# Altium PCB FormationPCB.PcbDoc
Units mm, origin at the board's own origin, x right, y up, seen from the top; angles counter-clockwise.
Board outline 40 x 40 mm, 2 copper layers (Top Layer, Bottom Layer); 11 components, 8 nets, 29 pads, 0 vias.
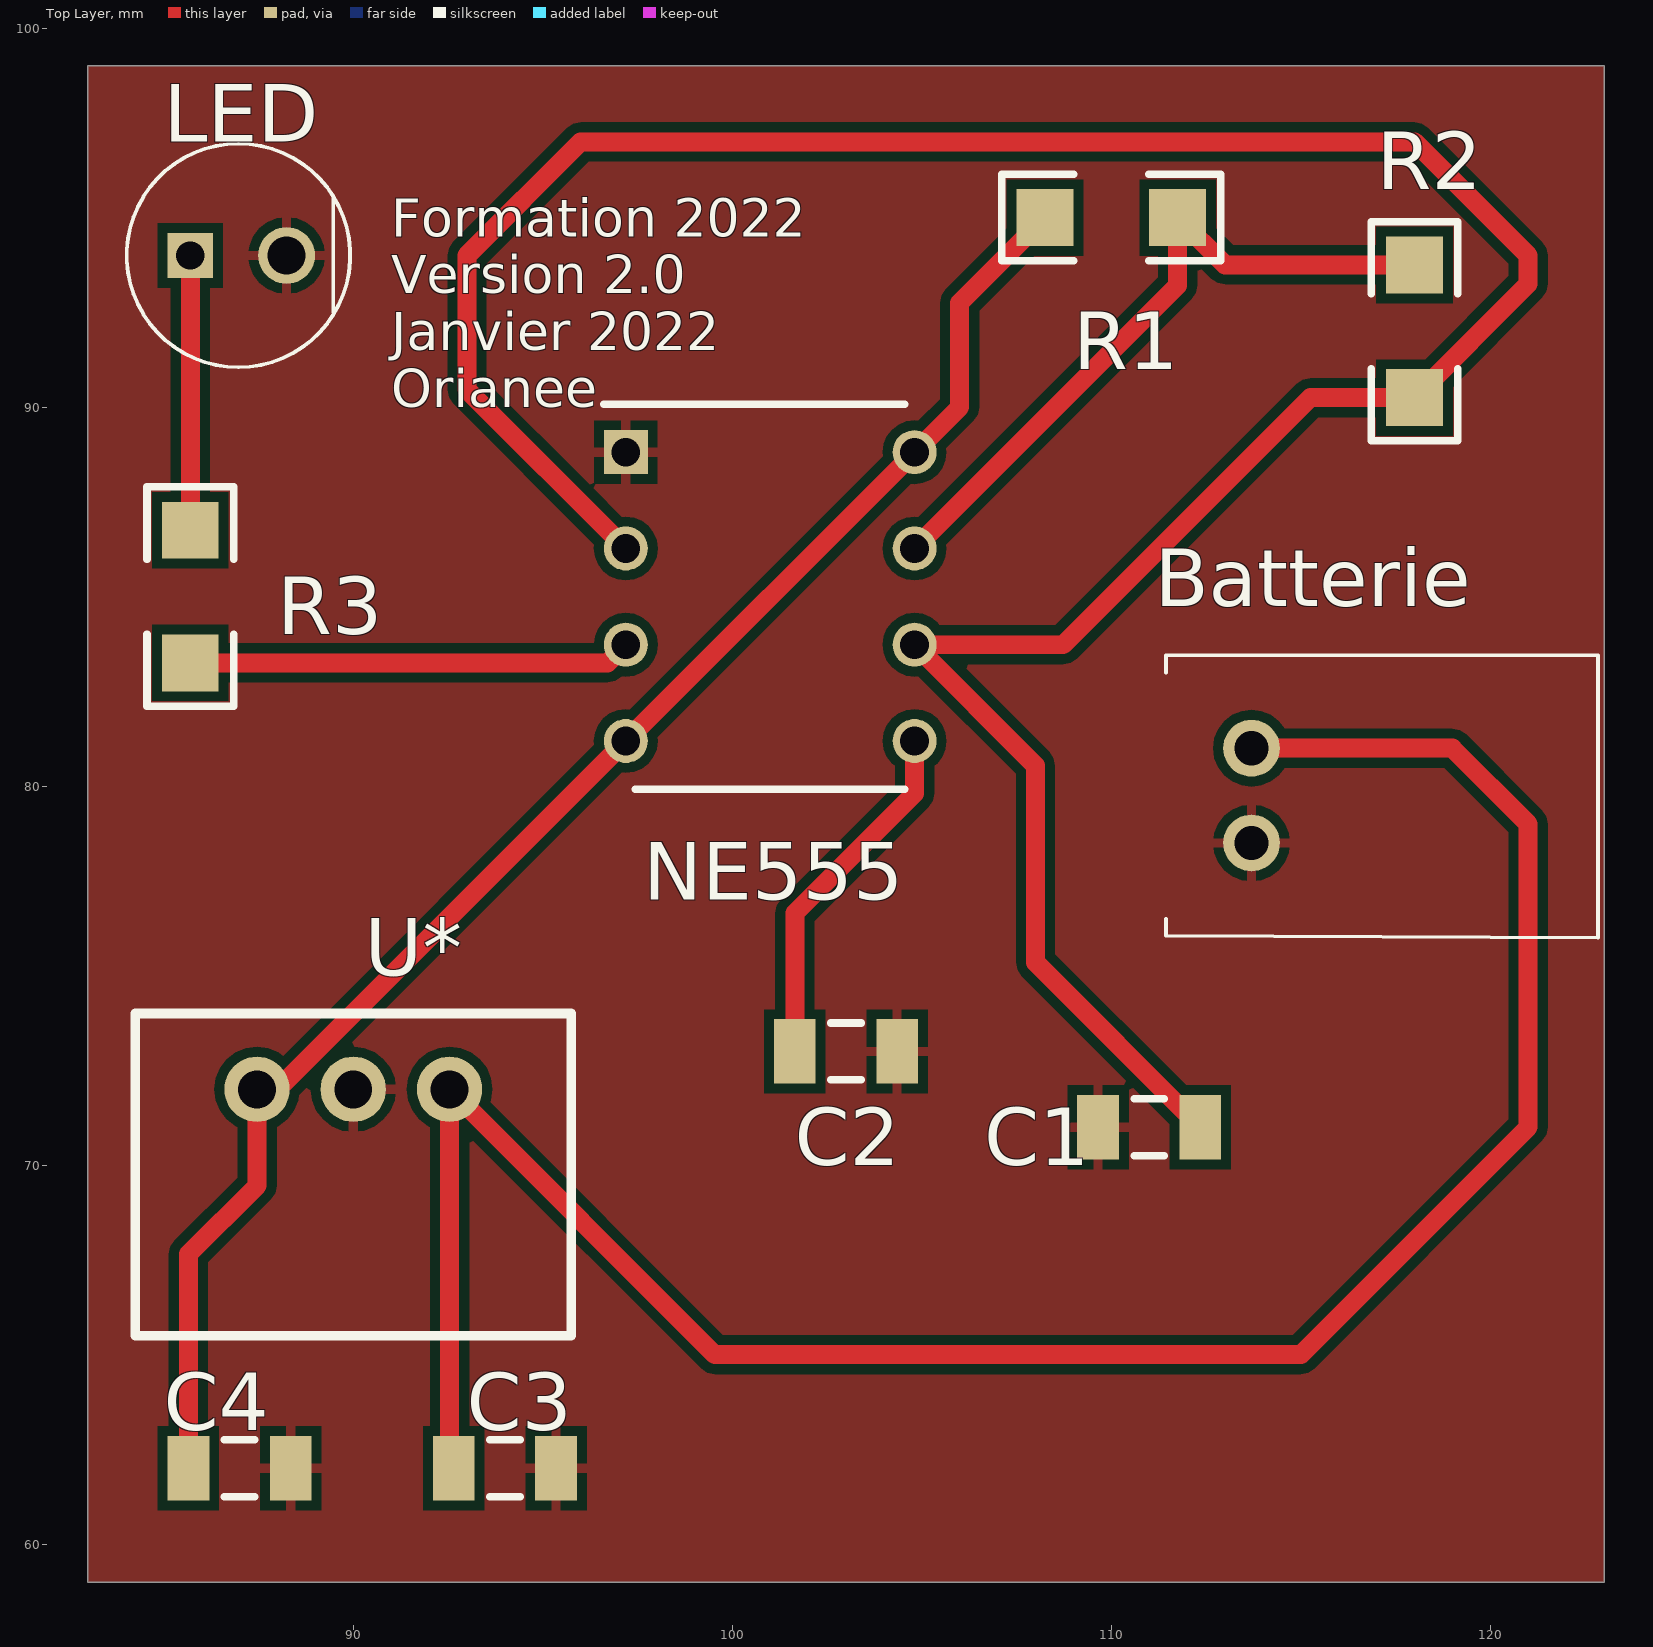
[diagram p0: Top Layer view]
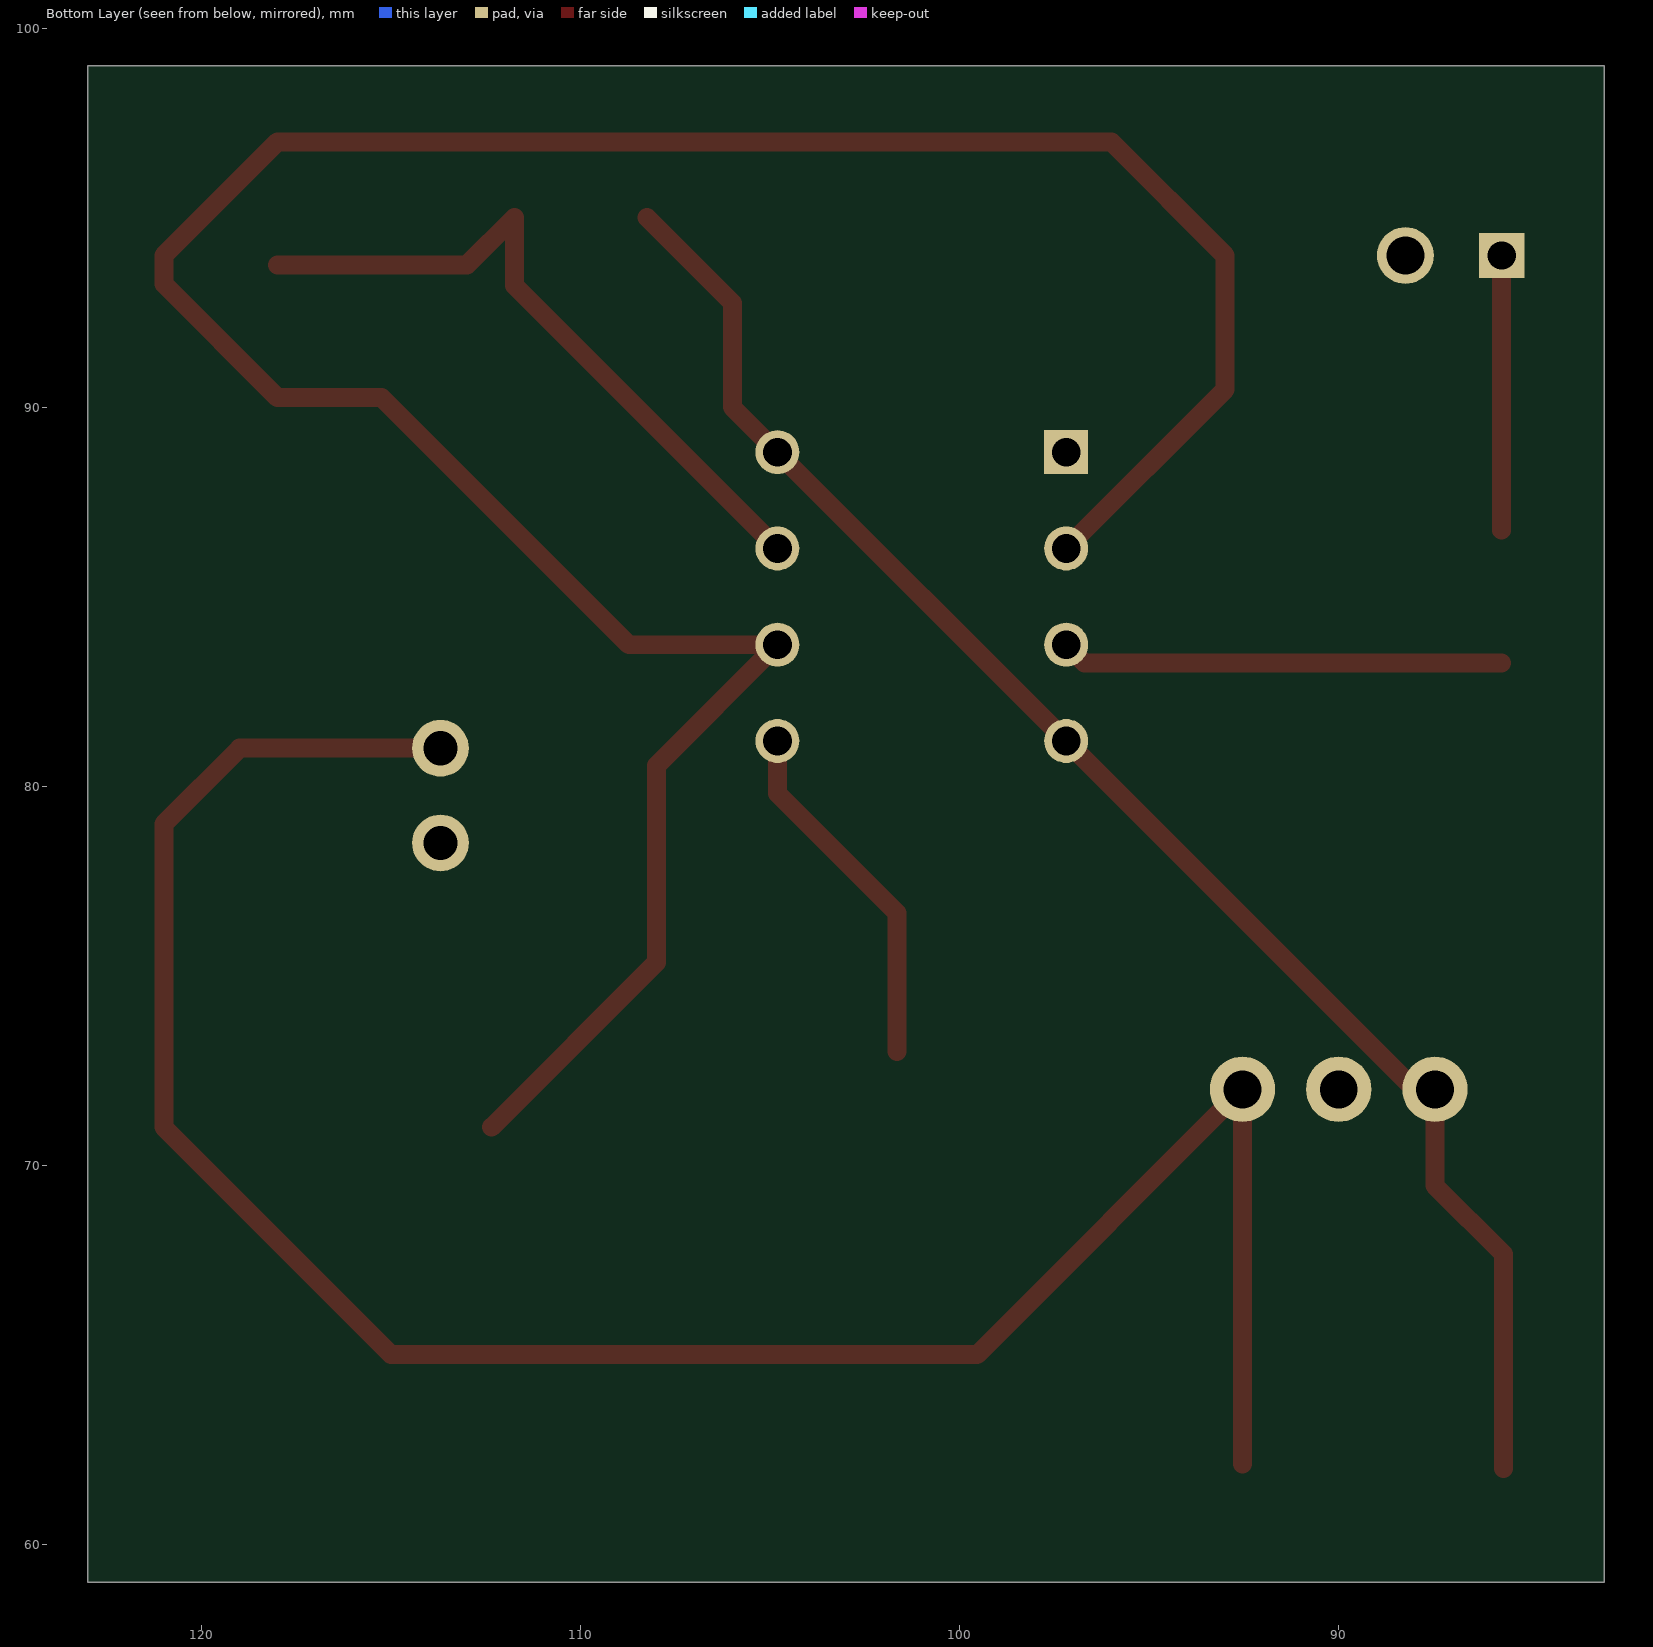
[diagram p1: Bottom Layer view, seen from below]
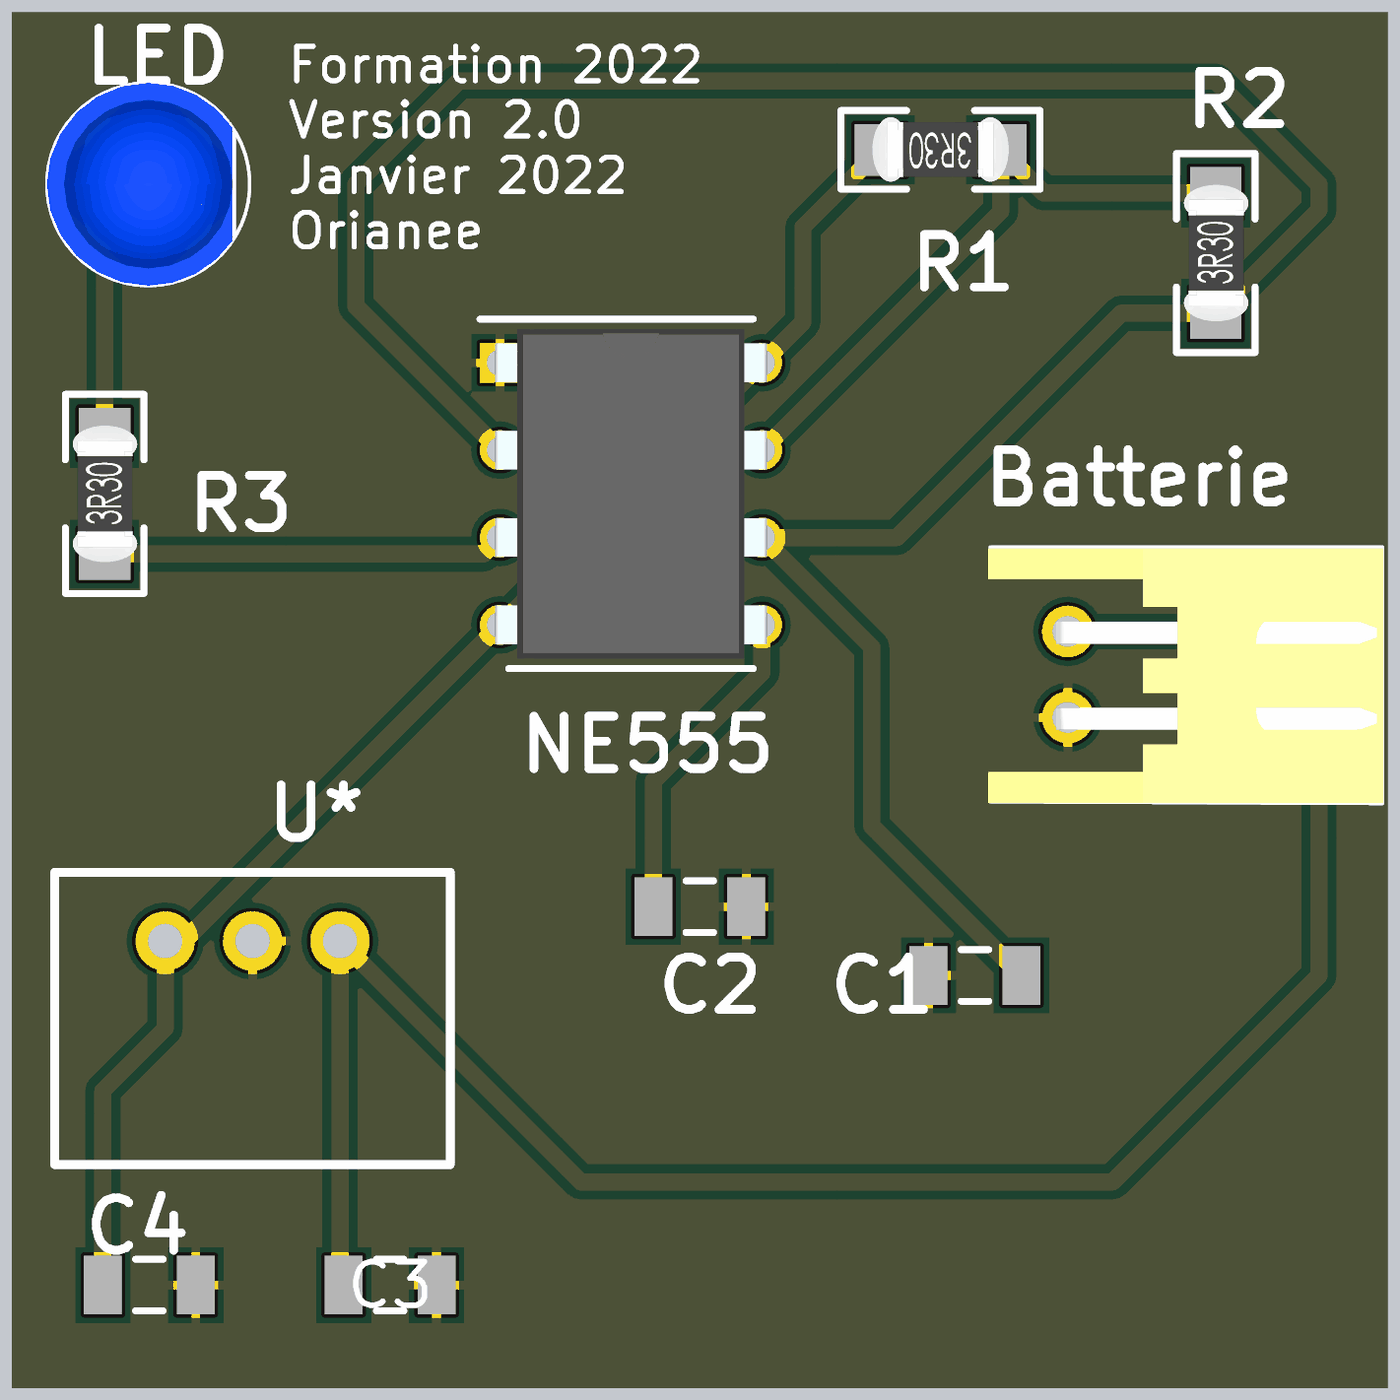
[diagram p2: 3D render of the assembled board from above, using the file's embedded part models]

## Layer stack, top to bottom
Top Solder: solder mask 0.0102, Solder Resist, Dk 3.5
Top Layer: signal copper 0.0356
Dielectric 1: dielectric 0.32, FR-4, Dk 4.8
Bottom Layer: signal copper 0.0356
Bottom Solder: solder mask 0.0102, Solder Resist, Dk 3.5

## Board outline
83,59 83,99 123,99 123,59

## Design rules (kind name [scope] priority, off if disabled: settings)
Clearance Clearance_1 [All] p1: gap=0.254
Clearance [All] p2: gap=0.254
PolygonConnect [All] p1: connectstyle=Relief reliefconductorwidth=0.254 reliefentries=4 polygonreliefangle="90 Angle" airgapwidth=0.254
RoutingVias [All] p1: holewidth=0.711 width=1.27 viastyle="Through Hole" minholewidth=0.711 minwidth=1.27 maxholewidth=0.711 maxwidth=1.27
SolderMaskExpansion [All] p1: expansion=0.102
Width [All] p1: maxlimit=5 minlimit=0.254 preferedwidth=0.5
30 further rules are at their usual default settings.

## Classes and differential pairs
component class Schema1: Batterie C1 C2 C3 C4 LED R1 R2 R3 U*

## Components (designator, comment, footprint, x,y, rotation, side; value= is the part's Value field where it differs from the comment)
Batterie "S2B-XH-A-1_LF__SN_" S2B-XH-A 113.7,81 r270 top
C1 "" C1206 111,71 r0 top
C2 "" C1206 103,73 r180 top
C3 "" C1206 94,62 r0 top
C4 "" C1206 87,62 r180 top
LED "151051BS04000" 151051BS04000 85.7,94 r0 top
NE555 "NE555N" DIP762W56P254L959H533Q8N 101,85 r0 top
R1 "" "Resistor 1206" 110,95 r180 top
R2 "" "Resistor 1206" 118,92 r90 top
R3 "" "Resistor 1206" 85.7,85 r90 top
U* "L78S12CV" R-78B 90,72 r0 top

## Footprints (in the part's own frame and the unit in brackets; to place one, negate y for a bottom-side part, rotate by r counter-clockwise, add the part's x,y. Pads: shape width x height; smd on the part's side, far side on the other; paste and mask are expansions set on the pad)
151051BS04000 [mm]
  rect 1.2x1.2 hole 0.75: 1(0,0)
  round 1.5 hole 1: 2(2.54,0)
  silkscreen extent -1.68,-2.95 4.22,2.95, body extent -1.68,-2.95 3.72,2.95, height 13.22
C1206 [mm] "Chip Capacitor, Body 3.2x1.6mm, IPC High Density"
  rect 1.1x1.7 smd: 1(-1.35,0) 2(1.35,0)
  silkscreen extent -0.4,-0.75 0.4,0.75, body extent -1.7,-0.9 1.7,0.9, height 1.3
DIP762W56P254L959H533Q8N [mm]
  rect 1.16x1.16 hole 0.76: 1(-3.81,3.81)
  round 1.16 hole 0.76: 2(-3.81,1.27) 3(-3.81,-1.27) 4(-3.81,-3.81) 5(3.81,-3.81) 6(3.81,-1.27) 7(3.81,1.27) 8(3.81,3.81)
  silkscreen extent -4.39,-5.08 3.55,5.08, body extent -3.95,-4.79 3.95,4.79, height 5.33
R-78B [mm]
  round 1.724 hole 1: 1(-2.54,0) 2(0,0) 3(2.54,0)
  silkscreen extent -5.75,-6.5 5.75,2
"Resistor 1206" [mm]
  rect 1.5x1.5 smd: 1(-1.75,0) 2(1.75,0)
  silkscreen extent -2.89,-1.14 2.89,1.14, body extent -1.98,-0.95 1.98,0.93, height 0.55
S2B-XH-A [mm]
  round 1.5 hole 0.9: 1(0,0) 2(2.5,0)
  silkscreen extent -2.45,-2.26 5,9.14, body extent -2.41,-2.32 4.99,9.18, height 6.15

## Part data
Batterie: "Connector"
C1 C2 C3 C4: library part "Cap Semi", "Capacitor (Semiconductor SIM Model)"
LED: "LED"
NE555: "Integrated Circuit"
R1 R2 R3: library part Res3, "Resistor"
U*: library part "Régulateur de tension linéaire"

## Nets (pads, with @x,y where several pads share a name; then routed paths per layer and width w, separated by ;. In a path a pad name is that pad's centre, name@x,y a point inside that pad or via, vN(x,y) a via of type N, cw(c..) or ccw(c..) an arc to the next point about the centre after c; other vN are vias at no path point)
+5V: C4.2 NE555.4 NE555.8 R1.2 U*.1 | length 42.7
  Top Layer w0.5: C4.2 85.65,67.65 87.46,69.46 U*.1 88,72 NE555.4 NE555.8 106,90 106,92.75 R1.2
ALIM: Batterie.1 C3.1 U*.3 | length 59.9
  Top Layer w0.5: C3.1@92.54,62.11 U*.3 99.54,65 115,65 121,71 121,79 119,81 Batterie.1
GND: Batterie.2 C1.1 C2.1 C3.2 C4.1 LED.2 NE555.1 U*.2
NetC1_2: C1.2 NE555.2 NE555.6 R2.1 | length 76.7
  Top Layer w0.5: NE555.2 93,90.46 93,94 96,97 118,97 121,94 121,93.25 R2.1 115.25,90.25 108.73,83.73 NE555.6 108,80.54 108,75.35 C1.2
NetC2_2: C2.2 NE555.5 | length 9.5
  Top Layer w0.5: C2.2 101.65,76.65 104.81,79.81 NE555.5
NetLED_1: LED.1 R3.2 | length 7.3
  Top Layer w0.5: R3.2 LED.1
NetNE555_7: NE555.7 R1.1 R2.2 | length 18.4
  Top Layer w0.5: NE555.7 111.75,93.21 R1.1 113,93.75 R2.2
OUTPUT: NE555.3 R3.1 | length 11.7
  Top Layer w0.5: R3.1 96.71,83.25 NE555.3

## Polygon pours and split planes (outlines as drawn)
GND on Top Layer "GND_plane" (solid, remove dead copper, pour order 4): 83,99 123,99 123,59 83,59

## Silkscreen, mask and mechanical layers (free items; w line width, h text height)
Top Overlay:
  text "Formation 2022 / Version 2.0 / Janvier 2022 / Orianee" at 91,90 h1
Mechanical 1:
  the board outline again, w1.2